# EAGLE board 2. prototipus - THT - Egyoldalas SMD FET (EAGLE 7.2.0)
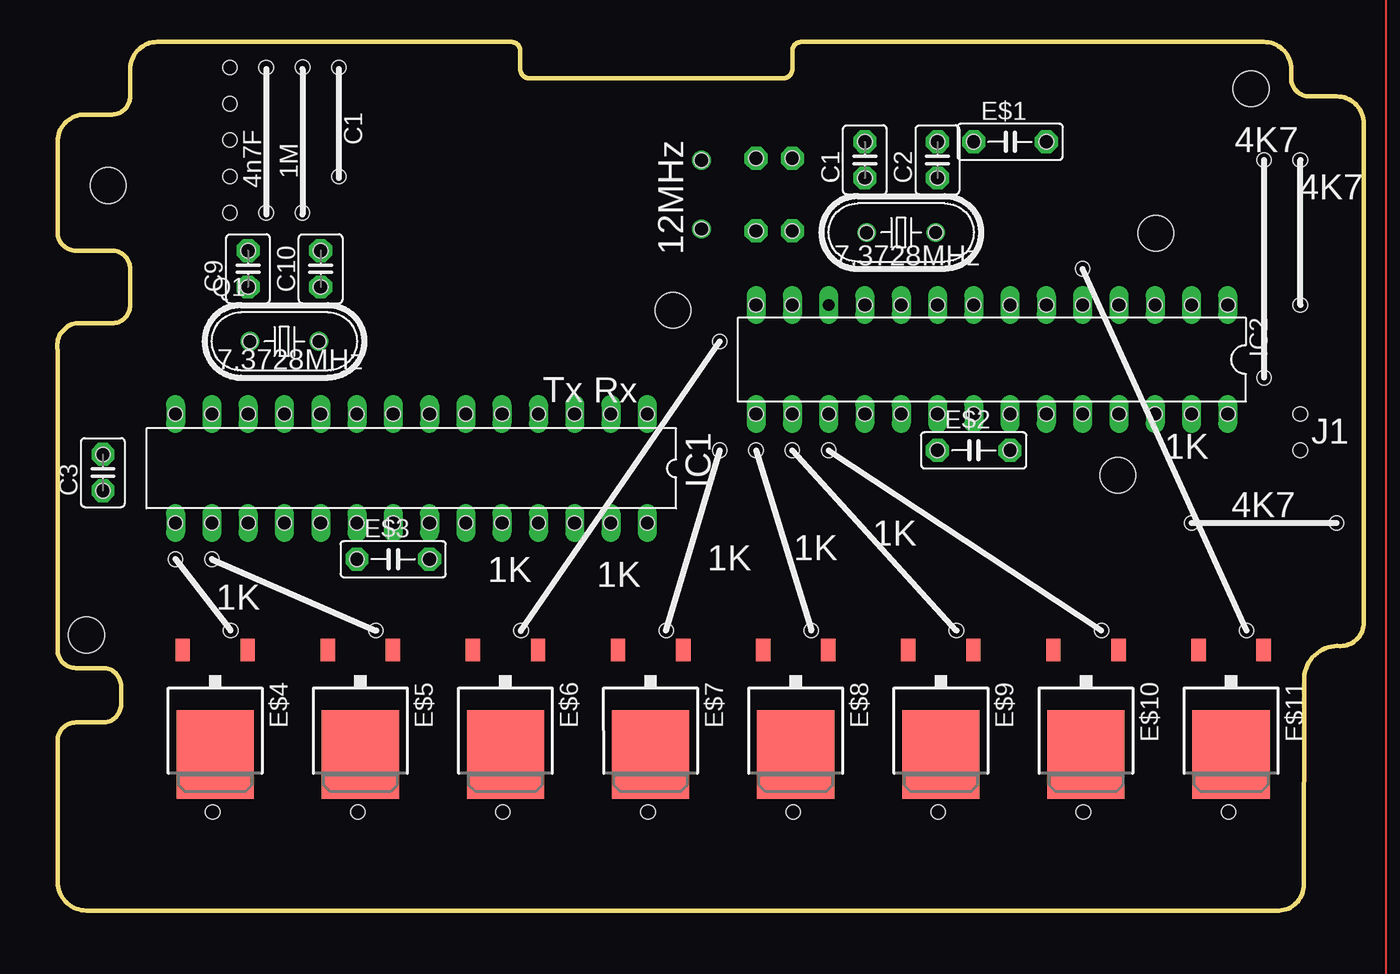
[diagram p0: board, top side]
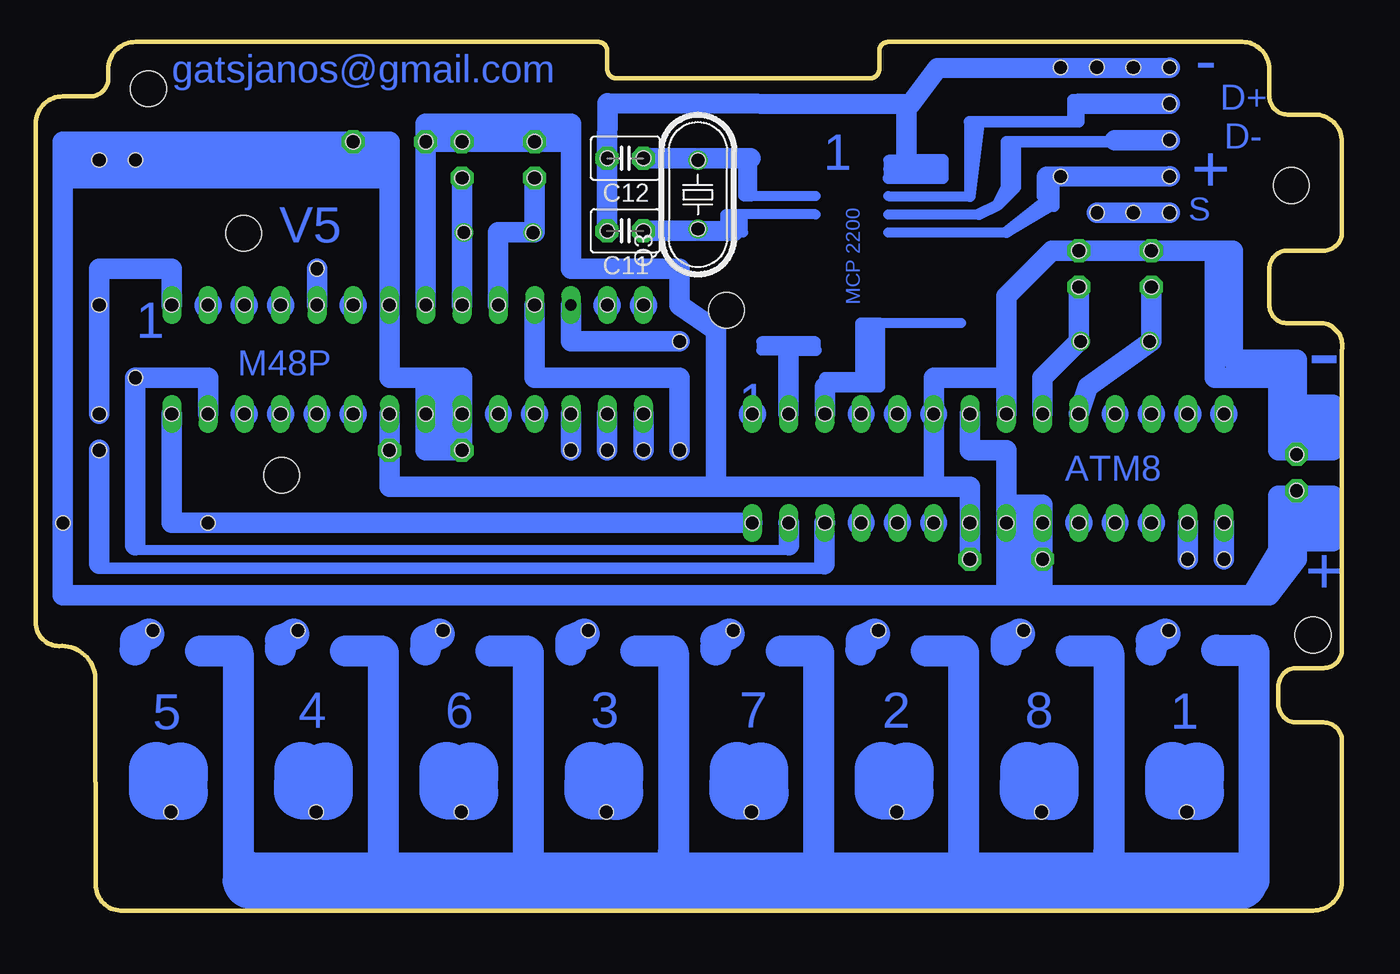
[diagram p1: board, bottom side, seen from below]

Size 91.47 x 60.78 mm. Coordinates in mm from the lower left corner, seen from the top.
Outline: 0.03,7.45 0.03,11.89 arc-90 1.3,13.16 3.21,13.16 arc90 4.48,14.43 4.48,15.7 arc90 3.21,16.97 1.3,16.97 arc-90 0.03,18.24 0.03,39.2 arc-90 1.3,41.1 3.84,41.1 arc90 5.11,42.37 5.11,44.91 arc90 3.84,46.18 1.3,46.18 arc-90 0.03,47.45 0.03,53.8 arc-90 1.94,55.7 3.84,55.7 arc90 5.11,56.98 5.11,58.88 arc-90 7.02,60.78 31.78,60.78 arc-90 32.42,60.15 32.42,58.88 arc90 33.05,58.24 50.83,58.24 arc90 51.47,58.88 51.47,60.15 arc-90 52.1,60.78 84.49,60.78 arc-90 86.39,58.88 86.39,58.24 arc90 87.66,56.98 89.57,56.98 arc-90 91.47,55.07 91.47,20.14 arc-90 89.84,18.51 arc90 87.3,16.34 87.25,1.67 arc-90 85.39,0
Outline: 0.05,8 0.05,2 arc90 2.05,0 85.37,0
Copper layers (1*16): Top 0.035mm / dielectric 1.5mm / Bottom 0.035mm
Design rules "default": minimum track width 10mil, minimum drill 24mil, track to track 8mil, track to pad 8mil, pad to pad 8mil, via to via 8mil, smd to smd 8mil, copper to edge 40mil, drill to drill 8mil, minimum pad ring 10mil, minimum via ring 8mil, stop-mask expansion 4mil, vias tented up to drill 0mil, thermal gap 10mil
Holes 1 mm at 79.41,27.13 84.49,37.29 71.79,44.91 12.15,19.59 10.83,24.59 8.29,24.59 48.93,32.21 51.47,32.21 54.01,32.21 46.39,39.83 46.39,32.21 89.57,27.13 19.71,58.99 19.71,51.37 12.09,58.99 12.09,56.45 12.09,53.91 12.09,51.37 12.09,48.83 14.63,48.83 17.17,48.83 14.63,58.99 17.19,59.02 51.46,52.64 51.46,47.56 48.92,47.56 48.92,52.64 45.11,52.51 45.11,47.69 13.37,46.18 13.37,43.64 18.45,43.64 18.45,46.18 18.32,39.82 13.49,39.83 18.45,34.75 20.99,34.75 56.55,51.26 56.55,53.8 61.63,53.8 61.63,51.26 61.5,47.45 56.66,47.43 59.09,42.37 61.63,42.37 64.17,42.37 23.53,34.75 26.07,34.75 33.69,34.75 8.29,34.75 10.83,34.75 13.37,34.75 15.91,34.75 28.61,34.75 31.15,34.75 36.23,34.75 38.77,34.75 41.31,34.75 41.31,27.13 38.77,27.13 36.23,27.13 33.69,27.13 31.15,27.13 28.61,27.13 26.07,27.13 23.53,27.13 20.99,27.13 18.45,27.13 15.91,27.13 13.37,27.13 10.83,27.13 8.29,27.13 48.93,34.75 51.47,34.75 54.01,34.75 56.55,34.75 59.09,34.75 61.63,34.75 64.17,34.75 66.71,34.75 69.25,34.75 71.79,34.75 74.33,34.75 76.87,34.75 79.41,34.75 81.95,34.75 81.95,42.37 79.41,42.37 76.87,42.37 74.33,42.37 71.79,42.37 69.25,42.37 66.71,42.37 56.55,42.37 51.47,42.37 48.93,42.37 64.17,53.8 69.25,53.8 20.99,24.59 26.07,24.59 87.03,42.37 87.03,52.53 84.49,52.53 61.63,32.21 66.71,32.21 3.21,31.92 3.21,29.38 87.03,34.75 87.03,32.21 22.31,19.59 32.47,19.59 10.88,6.89 21.04,6.89 31.2,6.89 42.63,19.59 41.36,6.89 52.79,19.59 51.52,6.89 62.95,19.59 61.68,6.89 73.11,19.59 71.84,6.89 83.27,19.59 82,6.89
Holes 2.5 mm at 83.58,57.5 76.91,47.4 74.27,30.46 2.06,19.28 3.57,50.74 43.11,42
vRestrict: area 29.2,39.2 to 40,52.5

## Footprints (pad centres in the part's own frame; a part is rotated, then mirrored left to right if it is on the bottom)
HC49U70 = drill 0.813: 1 -2.413,0; 2 2.413,0
C2.5-3 = drill 0.813 pad 1.6 octagon: 1 -1.27,0; 2 1.27,0
C5B2.5 = drill 0.813 pad 1.6 octagon: 1 -2.54,0; 2 2.54,0
TO252 = smd 1 x 1.6: 1 -2.28,-4.8; 2 2.28,-4.8 | smd 5.4 x 6.2: 3 0,2.5
DIL28-3 = drill 0.813 long: 1 -16.51,-3.81; 2 -13.97,-3.81; 3 -11.43,-3.81; 4 -8.89,-3.81; 5 -6.35,-3.81; 6 -3.81,-3.81; 7 -1.27,-3.81; 8 1.27,-3.81; 9 3.81,-3.81; 10 6.35,-3.81; 11 8.89,-3.81; 12 11.43,-3.81; 13 13.97,-3.81; 14 16.51,-3.81; 15 16.51,3.81; 16 13.97,3.81; 17 11.43,3.81; 18 8.89,3.81; 19 6.35,3.81; 20 3.81,3.81; 21 1.27,3.81; 22 -1.27,3.81; 23 -3.81,3.81; 24 -6.35,3.81; 25 -8.89,3.81; 26 -11.43,3.81; 27 -13.97,3.81; 28 -16.51,3.81

## Placement (x,y rotation side)
-  [HC49U70]  59.09,47.45 0 top
C1  [C2.5-3]  56.55,52.53 90 top
C2  [C2.5-3]  61.63,52.53 90 top
C3  [C2.5-3]  3.21,30.65 90 top
C9  [C2.5-3]  13.37,44.91 90 top
C10  [C2.5-3]  18.45,44.91 90 top
C11  [C2.5-3]  50.19,47.56 180 bottom
C12  [C2.5-3]  50.19,52.64 180 bottom
E$1  [C5B2.5]  66.71,53.8 0 top
E$2  [C5B2.5]  64.17,32.21 0 top
E$3  [C5B2.5]  23.53,24.59 0 top
E$4  [TO252]  11.06,13.43 180 top
E$5  [TO252]  21.22,13.43 180 top
E$6  [TO252]  31.38,13.43 180 top
E$7  [TO252]  41.54,13.43 180 top
E$8  [TO252]  51.7,13.43 180 top
E$9  [TO252]  61.86,13.43 180 top
E$10  [TO252]  72.02,13.43 180 top
E$11  [TO252]  82.18,13.43 180 top
IC1  MEGA8-P  [DIL28-3]  24.8,30.94 180 top
IC2  [DIL28-3]  65.44,38.56 180 top
Q1  [HC49U70]  15.91,39.83 0 top
Q3  [HC49U70]  45.11,50.1 90 bottom

## Library data of the parts
- Q1 Q3 = crystal; OC_FARNELL: unknown; OC_NEWARK: unknown
C1-C3 C9-C12 E$1-E$3 = capacitor-wima
E$4-E$11 = transistor-fet
IC1 = atmel; OC_FARNELL: unknown; OC_NEWARK: unknown
IC2 = ic-package

## Nets
GND: C1.2 C2.2 C9.2 C10.2 IC1.8 IC1.22 IC2.8 IC2.22
N$1: IC1.7 IC1.20 IC1.21 IC2.7 IC2.20 IC2.21
S$2: C2.1 IC2.9
S$3: C1.1 IC2.10
S$5: C10.1 IC1.9
S$6: C9.1
S$8: IC1.15
S$9: IC1.16
S$19: IC2.11
S$20: IC2.12
S$21: IC2.15
S$22: IC2.16
S$23: IC2.17
S$24: IC2.5
S$28: IC1.28 IC2.28
S$29: C11.2 C12.2
S$30: C11.1
S$38: IC1.2
S$42: IC1.3
S$46: IC1.14
S$58: IC2.27
S$60: IC2.1
S$68: C12.1

## Tracks (layer width: path | path; a pad name or v marks a point on that pad's centre or on a via)
GND
  Bottom 1.016: 57.82,53.8 C2.2 64.17,53.8 | 20.35,46.18 C10.2 C9.2
  Bottom 1.422: C1.2 57.82,53.8 | 57.82,53.8 64.17,53.8 | 64.17,53.8 IC2.8 | C1.2 56.55,55.07 | 56.55,55.07 57.82,55.07 | 57.82,55.07 57.82,53.8 | 57.82,55.07 64.17,55.07 64.17,53.8 | 55.28,53.8 C1.2 | 56.55,55.07 55.28,55.07 | 55.28,55.07 55.28,53.8 | IC2.22 66.71,29.67 43.85,29.67 | 28.61,29.67 26.07,29.67 IC1.22 26.07,24.59 | 28.61,29.67 43.85,29.67 | IC1.8 23.53,37.29 | 23.53,37.29 23.53,43.01 20.35,46.18 C9.2 8.92,46.18 | 8.92,46.18 8.92,37.29 4.48,37.29 | 4.48,32.21 4.48,37.29 | 3.21,37.29 4.48,37.29 | 23.53,37.29 28.61,37.29 28.61,29.67 | 3.21,37.29 3.21,38.56 7.65,38.56 7.65,46.18 8.92,46.18 | 3.21,32.84 3.21,37.29 | 55.28,55.07 54.01,55.07 54.01,53.8 | 55.28,53.8 54.01,53.8 | 54.01,53.8 54.01,44.91 46.39,44.91 46.39,42.37 43.86,40.62 43.85,29.67
N$1
  Bottom 1.422: 64.17,37.29 66.71,37.29 IC2.7 66.71,51.26 | 62.9,37.29 61.63,37.29 IC2.20 | IC2.21 62.9,34.75 | 62.9,34.75 IC2.20 | 66.71,51.26 67.98,51.26 | 67.98,51.26 81.95,51.26 | 81.95,51.26 84.49,51.26 | 84.49,51.26 87.03,51.26 | 87.03,51.26 89.57,51.26 | 66.71,51.26 66.71,53.8 67.98,53.8 | IC2.21 64.17,37.29 | 64.17,37.29 62.9,37.29 | 62.9,37.29 62.9,34.75 | 89.57,51.26 89.57,22.05 23.53,22.05 | 67.98,53.8 67.98,51.26 | IC2.20 IC2.21 | IC2.21 64.17,33.48 | 64.17,33.48 61.63,33.48 IC2.20 | 81.95,51.26 81.95,52.53 | 84.49,51.26 84.49,52.53 | 87.03,51.26 87.03,52.53 | 81.95,52.53 87.03,52.53 | 81.95,52.53 68.61,52.53 | 87.03,52.53 89.57,52.53 | 89.57,52.53 89.57,51.26 | IC2.20 61.63,32.21 64.17,32.21 64.17,33.48 | IC1.7 26.07,32.21 23.53,32.21 23.53,28.4 | 23.53,28.4 20.99,28.4 IC1.20 | IC1.21 23.53,28.4 | IC1.21 23.53,25.86 | IC1.20 IC1.21 | IC1.20 20.99,25.86 | 20.99,25.86 22.26,25.86 | 22.26,25.86 23.53,25.86 | 20.99,22.05 20.99,25.86 | 20.99,22.05 6.38,22.05 | 22.26,22.05 20.99,22.05 | 67.98,53.8 89.57,53.8 89.57,52.53 | 6.38,22.05 3.21,25.23 | 3.21,25.23 3.21,29.04 | 3.21,29.04 4.48,29.04 4.48,25.23 6.38,22.05 | 3.21,25.23 3.21,24.59 | 3.21,24.59 5.75,22.05 | 5.75,22.05 6.38,22.05 | 5.75,22.05 5.11,22.05 3.21,24.59 | 23.53,25.86 23.53,22.05 | 23.53,22.05 22.26,22.05 | 22.26,22.05 22.26,25.86 | 1.94,25.86 0.67,25.86 0.67,27.77 0.67,28.4 0.67,29.04 3.21,29.04 | 1.94,25.86 1.94,28.4 | 1.94,25.86 2.57,25.86
S$1
  Bottom 0.7: 38.77,25.23 84.49,25.23
S$2
  Bottom 1.422: IC2.9 C2.1
S$3
  Bottom 1.422: C1.1 56.55,47.45 59.09,47.45 IC2.10
S$4
  Bottom 0.813: 36.23,23.95 87.03,23.95
S$5
  Bottom 1.422: C10.1 18.45,39.83 20.99,37.29 IC1.9
S$6
  Bottom 0.305: 13.37,39.83 14,39.83
  Bottom 1.422: C9.1 13.37,39.83 17.81,36.66 18.45,34.75
S$7
  Bottom 2.184: 8.79,18.23 6.25,18.23
S$8
  Bottom 1.422: 8.29,24.59 IC1.15
S$9
  Bottom 1.422: IC1.16 10.83,24.59
S$10
  Bottom 2.184: 13.39,18.22 13.38,18.93 12.42,19.35
S$11
  Bottom 2.184: 23.55,18.22 23.54,18.93 22.58,19.35
S$12
  Bottom 2.184: 29.14,18.18 26.6,18.18
S$13
  Bottom 2.184: 26.51,18.05 26.51,4.08
S$14
  Bottom 2.184: 33.71,18.22 33.7,18.93 32.74,19.35
S$15
  Bottom 3.81: 10.2,9.86 10.22,8.31 | 11.9,9.9 11.92,8.35 | 10.2,8.24 11.75,8.26 | 20.36,8.24 21.91,8.26 | 22.06,9.9 22.08,8.35 | 20.36,9.86 20.38,8.31
S$16
  Bottom 3.81: 30.52,8.24 32.07,8.26 | 32.22,9.9 32.24,8.35 | 30.52,9.86 30.54,8.31
S$17
  Bottom 2.184: 39.3,18.18 36.76,18.18
S$18
  Bottom 4: 76.37,2.11 7.22,2.07
S$19
  Bottom 1.422: 46.39,32.21 46.39,37.29 56.55,37.29 IC2.11
S$20
  Bottom 1.422: IC2.12 54.01,39.83 46.39,39.83
S$21
  Bottom 1.422: IC2.15 48.93,32.21
S$22
  Bottom 1.422: IC2.16 51.47,32.21
S$23
  Bottom 1.422: IC2.17 54.01,32.21
S$24
  Bottom 1.422: IC2.5 71.79,44.91
S$26
  Bottom 0.813: 18.88,55.43 18.88,56.76 18.15,56.76
S$27
  Bottom 1.422: 1.94,35.38 2.57,35.38 | 1.94,35.38 1.94,32.21 | 1.94,35.38 0.67,35.38 0.67,32.21 4.48,32.21
S$28
  Bottom 1.422: IC2.28 81.95,27.13 IC1.28
S$29
  Bottom 1.422: 12.09,58.99 28.36,58.94 30.23,56.44 51.45,56.5 C12.2 C11.2
S$30
  Bottom 1.422: C11.1 45.11,47.56 42.63,47.53
S$31
  Bottom 0.813: 26.12,55.18 18.44,55.18 18.44,56.45
  Bottom 1.422: 18.44,56.45 12.09,56.45
S$32
  Bottom 0.7: 36.86,49.99 41.31,49.99 | 41.31,49.99 41.31,52.53 41.94,52.53 41.94,49.99 41.31,49.99
  Bottom 0.813: 44.99,52.52 41.31,52.53
S$33
  Bottom 2.184: 6.19,18.05 6.19,2.08
S$34
  Bottom 0.7: 31.78,48.72 25.43,48.72
  Bottom 0.813: 23.53,50.76 23.53,53.8 22.89,53.8 | 22.89,53.8 22.89,50.62 24.16,49.35 | 22.89,53.8 15.91,53.8 | 25.43,48.72 24.16,49.35 | 24.16,49.35 23.53,50.62
S$35
  Bottom 1.422: 12.09,51.37 20.67,51.35
S$36
  Bottom 1.422: 12.09,53.91 15.92,53.91 15.92,53.9
S$37
  Bottom 1.422: 12.09,48.83 17.17,48.83
S$38
  Bottom 0.7: 36.86,39.83 40.67,39.83 40.67,39.2 38.77,39.2 36.86,39.2 36.86,39.83
  Bottom 0.813: 38.13,39.2 38.77,39.2
  Bottom 1.422: IC1.2 38.77,39.2
S$39
  Bottom 2.184: 18.98,18.18 16.44,18.18
S$40
  Bottom 2.184: 16.35,18.05 16.35,4.08
S$41
  Bottom 2.184: 36.67,18.05 36.67,4.08
S$42
  Bottom 0.7: 26.7,41.1 32.42,41.1
  Bottom 0.813: 33.05,36.66 36.23,36.66 36.23,37.29 33.69,37.29 | 33.05,36.66 33.05,37.29 | 33.05,37.29 33.05,40.47 | 33.05,37.29 33.69,37.29 | 33.05,36.66 32.42,36.66 32.42,41.1 33.69,41.1 33.69,37.29
  Bottom 1.422: IC1.3 36.23,36.66
S$43
  Bottom 0.813: 36.86,39.2 38.77,39.2
S$44
  Bottom 0.7: 30.51,51.9 31.78,51.9 | 31.78,51.9 31.78,51.26 | 30.51,52.53 31.78,52.53 31.78,51.9
  Bottom 0.813: 31.78,51.26 27.97,51.26 27.97,52.53 29.88,52.53 29.88,51.9 28.61,51.9
  Bottom 1.422: 30.51,56.34 30.51,52.53 30.51,51.9
S$45
  Bottom 0.813: 25.84,55.19 25.86,55.19
S$48
  Bottom 2.184: 43.87,18.22 43.86,18.93 42.9,19.35
S$49
  Bottom 3.81: 40.68,8.24 42.23,8.26 | 42.38,9.9 42.4,8.35 | 40.68,9.86 40.7,8.31
S$50
  Bottom 0.7: 31.78,49.99 26.07,49.99
  Bottom 0.813: 26.07,49.99 25.43,55.07 26.07,55.07 26.07,49.99
S$51
  Bottom 2.184: 49.46,18.18 46.92,18.18
S$52
  Bottom 2.184: 46.83,18.05 46.83,4.08
S$53
  Bottom 2.184: 54.03,18.22 54.02,18.93 53.06,19.35
S$54
  Bottom 3.81: 50.84,8.24 52.39,8.26 | 52.54,9.9 52.56,8.35 | 50.84,9.86 50.86,8.31
S$55
  Bottom 2.184: 59.62,18.18 57.08,18.18
S$56
  Bottom 1.422: 38.77,27.13 38.74,27.13 38.74,25.58
S$57
  Bottom 1.422: 36.23,27.14 36.24,27.14 36.24,24.25
S$58
  Bottom 1.422: 84.49,37.29 79.41,37.29 IC2.27
S$59
  Bottom 1.422: 84.49,37.3 84.52,37.3 84.52,25.55
S$60
  Bottom 1.422: IC2.1 81.95,44.91 87.03,44.91 87.03,34.75
S$61
  Bottom 1.422: 87.02,32.26 87.02,24.25
S$62
  Bottom 2.184: 56.99,18.05 56.99,4.08
S$63
  Bottom 2.184: 64.19,18.22 64.18,18.93 63.22,19.35
S$64
  Bottom 3.81: 61,8.24 62.55,8.26 | 62.7,9.9 62.72,8.35 | 61,9.86 61.02,8.31
S$65
  Bottom 2.184: 69.78,18.18 67.24,18.18
S$68
  Bottom 1.422: 41.43,52.65 C12.1
S$69
  Bottom 2.184: 67.15,18.05 67.15,4.08
S$70
  Bottom 2.184: 74.35,18.22 74.34,18.93 73.38,19.35
S$71
  Bottom 3.81: 71.16,8.24 72.71,8.26 | 72.86,9.9 72.88,8.35 | 71.16,9.86 71.18,8.31
S$72
  Bottom 0.813: 20.2,49.27 20.2,51.44 19.56,51.44
S$73
  Bottom 0.7: 36.86,48.72 41.94,48.72 | 41.94,48.72 42.58,48.72 | 42.58,48.72 42.58,47.45 41.94,47.45 41.94,48.72 | 42.58,48.72 43.21,48.72 43.21,48.09
S$74
  Bottom 0.7: 31.78,47.45 23.53,47.45
  Bottom 0.813: 20.35,49.35 23.53,47.45 20.35,49.99
S$75
  Bottom 0.813: 20.99,51.26 20.99,49.99
S$76
  Bottom 2.184: 79.94,18.18 77.4,18.18
S$77
  Bottom 2.184: 77.31,18.05 77.31,2.08
S$78
  Bottom 2.184: 84.51,18.22 84.5,18.93 83.54,19.35
S$79
  Bottom 3.81: 81.32,8.24 82.87,8.26 | 83.02,9.9 83.04,8.35 | 81.32,9.86 81.34,8.31
(copper drawn outside any net)
  shapes: Bottom circle x26, Top area x1

## Text on the board
Bottom: - | gatsjanos@gmail.com | D+ | D- | 1 | + | S | V5 | MCP 2200 | 1 | - | M48P | 1 | ATM8 | + | 1 | 8 | 2 | 7 | 3 | 6 | 4 | 5
tPlace: 4n7F | C1 | 4K7 | 1M | 4K7 | 12MHz | 7.3728MHz | 7.3728MHz | Tx | Rx | J1 | 1K | 4K7 | 1K | 1K | 1K | 1K | 1K | 1K